# EAGLE board RedBot_Buzzer (EAGLE 6.4)
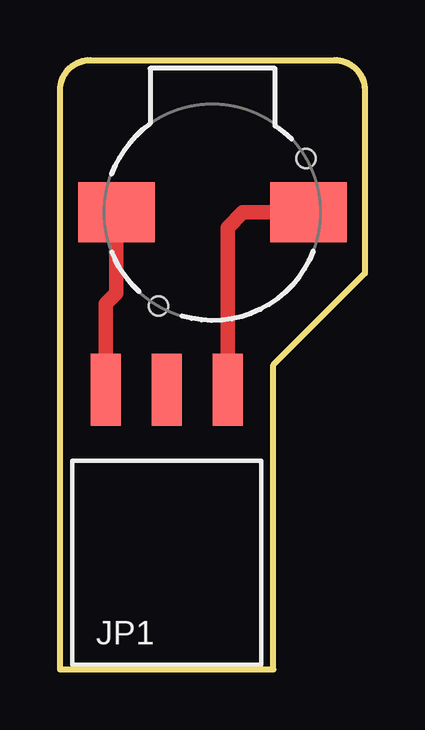
[diagram p0: board, top side]
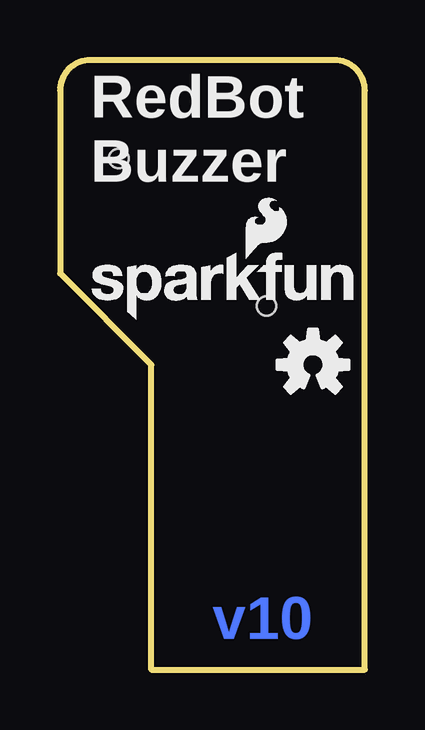
[diagram p1: board, bottom side, seen from below]

Size 12.7 x 25.4 mm. Coordinates in mm from the lower left corner, seen from the top.
Outline: 0,0 0,24.13 arc-90 1.27,25.4 11.43,25.4 arc-90 12.7,24.13 12.7,16.51 8.89,12.7 8.89,0 0,0
Copper layers (1*16): Top 0.035mm / dielectric 1.5mm / Bottom 0.035mm
Design rules "SparkFun": minimum track width 8mil, minimum drill 20mil, track to track 8mil, track to pad 8mil, pad to pad 8mil, via to via 8mil, smd to smd 8mil, copper to edge 8mil, drill to drill 8mil, minimum pad ring 12mil, minimum via ring 10mil, stop-mask expansion 4mil, vias tented up to drill 20mil, thermal gap 10mil

## Footprints (pad centres in the part's own frame; a part is rotated, then mirrored left to right if it is on the bottom)
BUZZER-CCV = smd 3.2 x 2.5: + 4,0; - -4,0 | hole 0.8: -3.9,-2.25; 2.25,3.9
1X03_SMD_RA_FEMALE = smd 1.25 x 3: 1 -2.54,7.225; 2 0,7.225; 3 2.54,7.225

## Placement (x,y rotation side)
B1  Buzzer  [BUZZER-CCV]  6.35,19.05 180 top
FRAME1  FRAME-LETTER  [CREATIVE_COMMONS]  2.54,-15.24 0 top  (outside the outline)
JP1  1x3 RA Female .1"  [1X03_SMD_RA_FEMALE]  4.45,4.45 0 top
LOGO1  OSHW-LOGOS  [OSHW-LOGO-S]  2.16,12.7 0 bottom
LOGO2  SFE_LOGO_NAME_FLAME.1_INCH  [SFE_LOGO_NAME_FLAME_.1]  11.81,14.48 0 bottom

## Library data of the parts
B1 = SparkFun
FRAME1 LOGO1 LOGO2 = SparkFun-Aesthetics
JP1 = SparkFun-Connectors; PROD_ID: CONN-10926

## Nets
N$1: B1.+ JP1.1
N$2: B1.- JP1.3

## Tracks (layer width: path | path; a pad name or v marks a point on that pad's centre or on a via)
N$1
  Top 0.61: B1.+ 2.35,15.69 1.91,15.24 JP1.1
N$2
  Top 0.61: JP1.3 6.99,18.41 7.62,19.05 B1.-

## Text on the board
Bottom: v10
bPlace: RedBot / Buzzer
tDocu: M. Hord